# Altium PCB MotherBoard.PcbDoc
Units mil, origin at the board's own origin, x right, y up, seen from the top; angles counter-clockwise.
Board outline 4305 x 3670 mil, 2 copper layers (Top Layer, Bottom Layer); 19 components, 19 nets, 116 pads, 2 vias.
Unrouted connection lines stored in the file: 15.
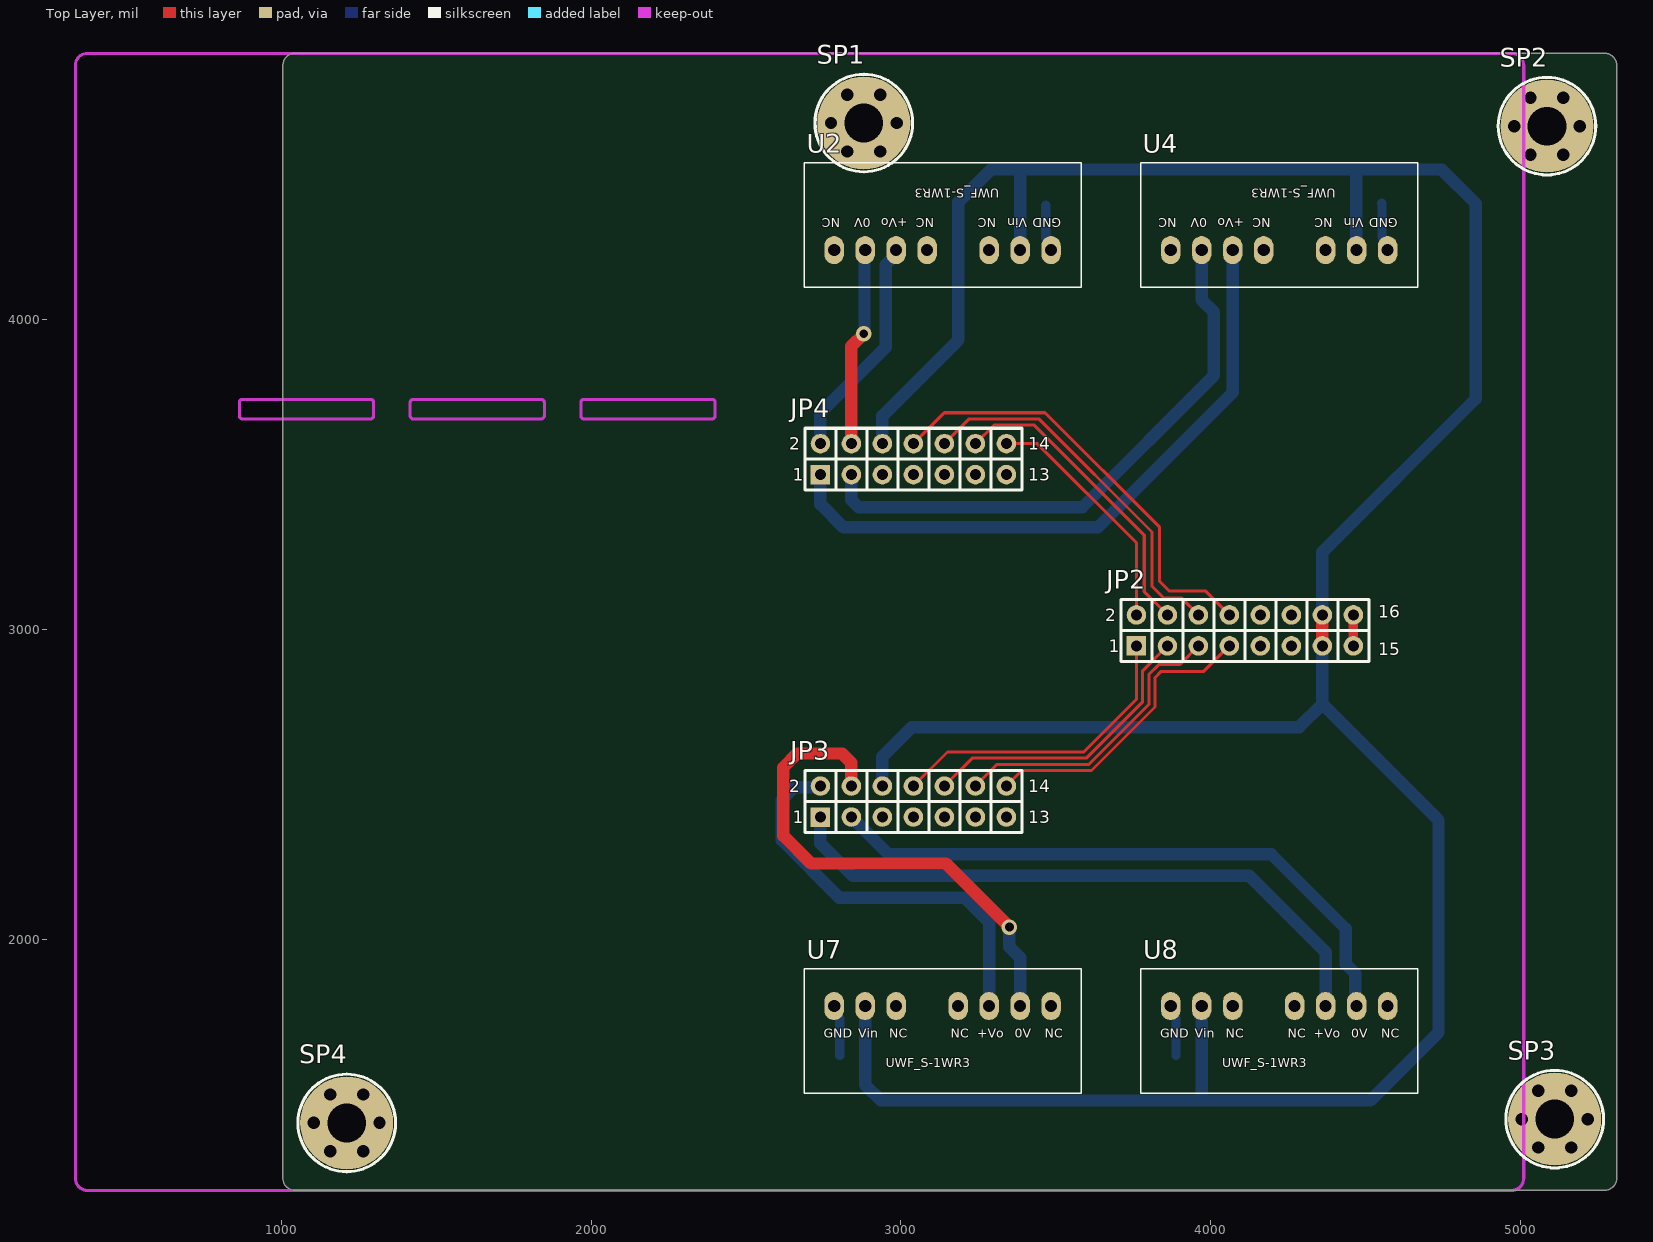
[diagram p0: Top Layer view]
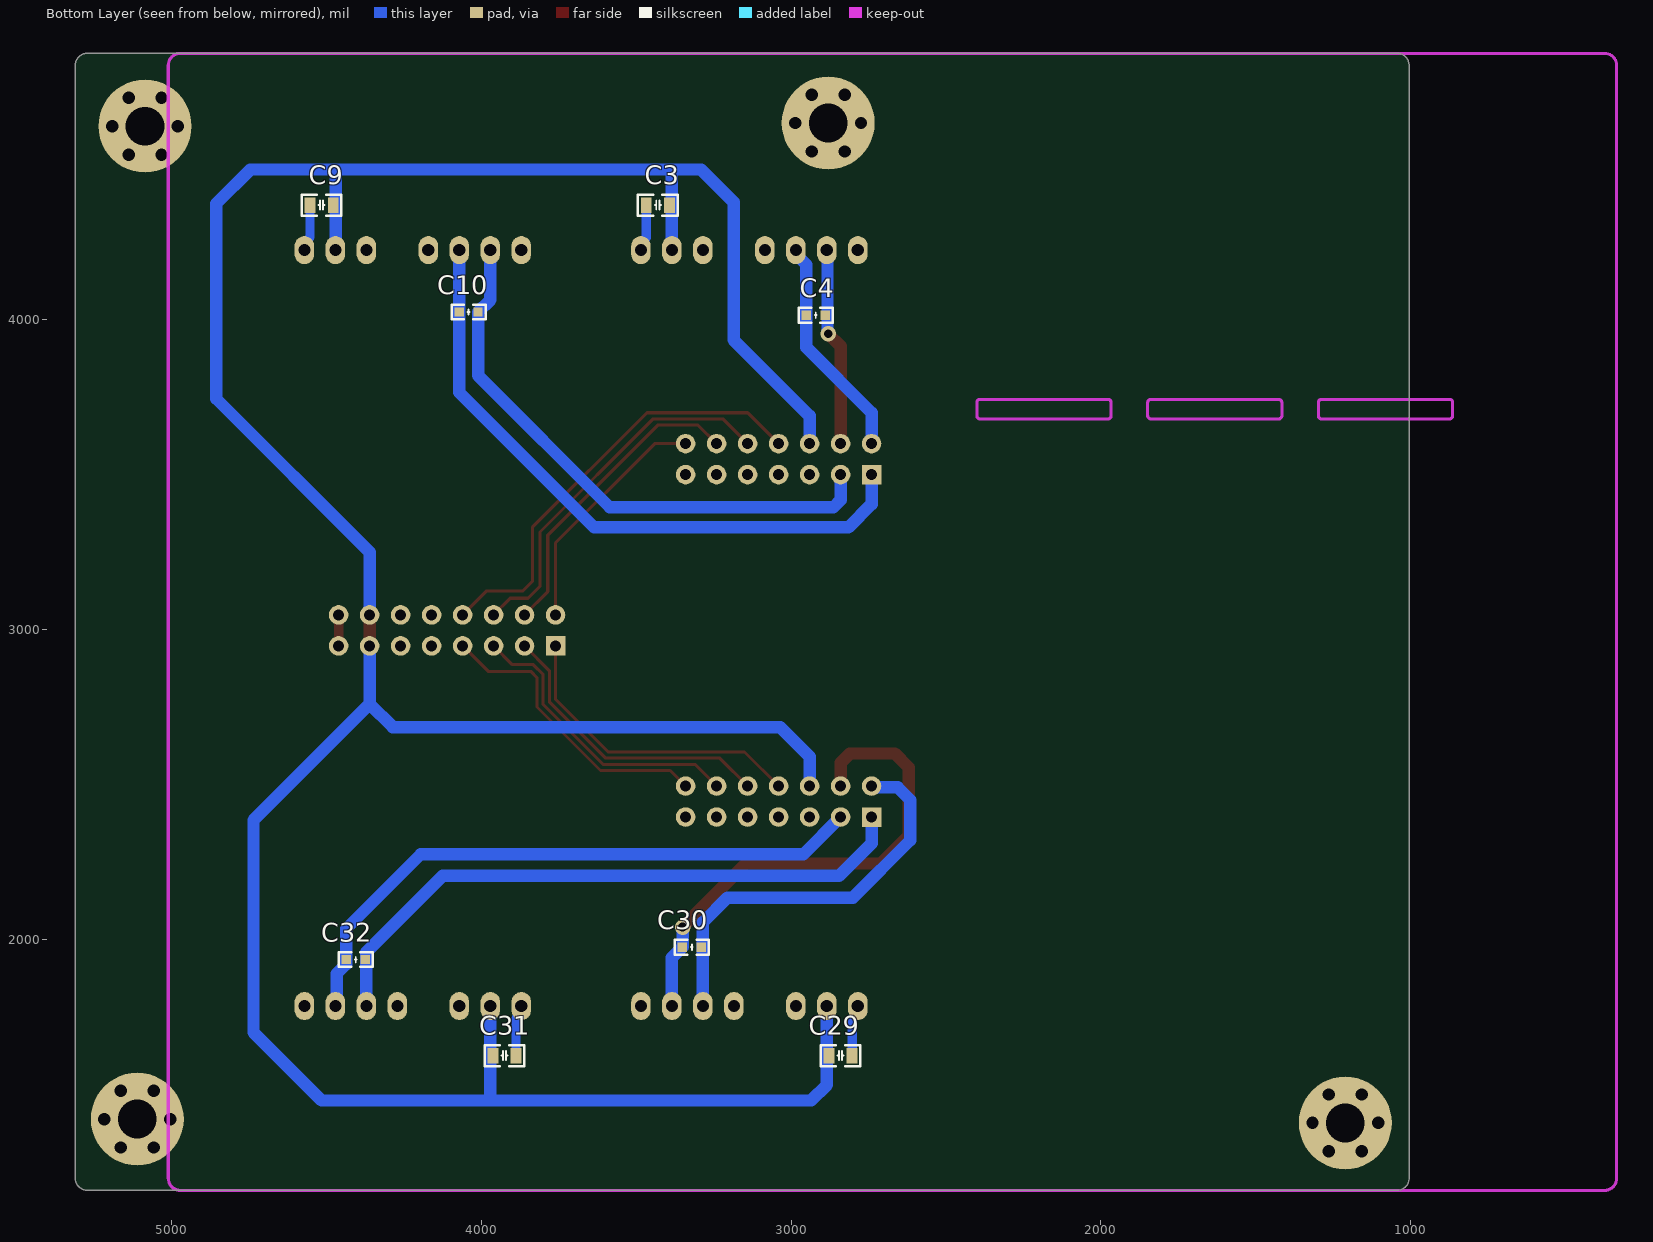
[diagram p1: Bottom Layer view, seen from below]

## Layer stack, top to bottom
Top Solder: solder mask 0.4, Solder Resist, Dk 3.5
Top Layer: signal copper 1.4
Dielectric 1: dielectric 12.6, FR-4, Dk 4.8
Bottom Layer: signal copper 1.4
Bottom Solder: solder mask 0.4, Solder Resist, Dk 3.5

## Board outline
1005,1229 1005,4821 cw(c1044,4821) 1044,4860 5271,4860 cw(c5271,4821) 5310,4821 5310,1229 cw(c5271,1229) 5271,1190 1044,1190 cw(c1044,1229)

## Design rules (kind name [scope] priority, off if disabled: settings)
Clearance [All] p1: gap=10 ignorepadtopadclearanceinfootprint=FALSE except(0: Arc-Hole Track-Hole SMDPad-Hole THPad-Hole Via-Hole Fill-Hole Poly-Hole Region-Hole Text-Hole)
PolygonConnect [All] p1: connectstyle=Direct reliefconductorwidth=10 reliefentries=4 polygonreliefangle="90 Angle" airgapwidth=10
RoutingVias [All] p1: holewidth=28 width=50 viastyle="Through Hole" minholewidth=28 minwidth=50 maxholewidth=28 maxwidth=50
SolderMaskExpansion [All] p1: expansion=4 istentingtop=FALSE
Width [All] p1: maxlimit=50 minlimit=5 preferedwidth=10 minimp=50.000000 maximp=50.000000 favimp=50.000000
30 further rules are at their usual default settings.

## Components (designator, comment, footprint, x,y, rotation, side; value= is the part's Value field where it differs from the comment)
C3 "100u" "C 0805_L" 3430,4370 r180 bottom
C4 "22u" "C 0603_L" 2920,4015 r0 bottom
C9 "100u" "C 0805_L" 4515,4370 r180 bottom
C10 "22u" "C 0603_L" 4040.59,4025 r0 bottom
C29 "100u" "C 0805_L" 2840,1625 r0 bottom
C30 "22u" "C 0603_L" 3320,1975 r180 bottom
C31 "100u" "C 0805_L" 3925,1625 r0 bottom
C32 "22u" "C 0603_L" 4405,1935 r180 bottom
JP2 "Header 8X2" HDR2.54-LI-2x8P 4110,2997.5 r0 top
JP3 "Header 2X7" HDR2.54-LI-2x7P 3040,2445 r0 top
JP4 "Header 2X7" HDR2.54-LI-2x7P 3040,3550 r0 top
SP1 "M3铜柱" M3x7+6_N 2880,4635 r0 top
SP2 "M3铜柱" M3x7+6_N 5085,4625 r0 top
SP3 "M3铜柱" M3x7+6_N 5110,1420 r0 top
SP4 "M3铜柱" M3x7+6_N 1210.94,1407.62 r0 top
U2 "UWF_S-1WR3" UWF_S-1WR3 3134.35,4225 r180 top
U4 "UWF_S-1WR3" UWF_S-1WR3 4220.59,4225 r180 top
U7 "UWF_S-1WR3" UWF_S-1WR3 3134.35,1785 r0 top
U8 "UWF_S-1WR3" UWF_S-1WR3 4220.59,1785 r0 top

## Footprints (in the part's own frame and the unit in brackets; to place one, negate y for a bottom-side part, rotate by r counter-clockwise, add the part's x,y. Pads: shape width x height; smd on the part's side, far side on the other; paste and mask are expansions set on the pad)
"C 0603_L" [mil] "无极性贴片电容"
  rect 30x30 smd: 1(-30.59,0) 2(30.59,0)
  silkscreen extent -55,-24 55,24, body extent -31,-16 31,16, height 32
"C 0805_L" [mil] "无极性贴片电容"
  rect 35x50 smd: 1(-37.4,0) 2(37.4,0)
  silkscreen extent -64,-34 64,34, body extent -39,-24 39,24, height 20
HDR2.54-LI-2x7P [mm] "双排排针，7x2脚"
  rect 1.6x1.6 hole 0.9: 1(-7.62,-1.27)
  round 1.6 hole 0.9: 2(-7.62,1.27) 3(-5.08,-1.27) 4(-5.08,1.27) 5(-2.54,-1.27) 6(-2.54,1.27) 7(0,-1.27) 8(0,1.27) 9(2.54,-1.27) 10(2.54,1.27) 11(5.08,-1.27) 12(5.08,1.27) 13(7.62,-1.27) 14(7.62,1.27)
  silkscreen extent -8.89,-2.54 8.89,2.54, body extent -8.89,-2.54 8.89,2.54, height 8.5
HDR2.54-LI-2x8P [mm] "双排排针，8x2脚"
  rect 1.6x1.6 hole 0.9: 1(-8.89,-1.27)
  round 1.6 hole 0.9: 2(-8.89,1.27) 3(-6.35,-1.27) 4(-6.35,1.27) 5(-3.81,-1.27) 6(-3.81,1.27) 7(-1.27,-1.27) 8(-1.27,1.27) 9(1.27,-1.27) 10(1.27,1.27) 11(3.81,-1.27) 12(3.81,1.27) 13(6.35,-1.27) 14(6.35,1.27) 15(8.89,-1.27) 16(8.89,1.27)
  silkscreen extent -10.16,-2.54 10.16,2.54, body extent -10.16,-2.54 10.16,2.54, height 8.5
M3x7+6_N [mil] "M3铜柱，长：7mm，螺纹长：6mm"
  round 40 hole 40: 1(-106,0) 1(-53,-91.8) 1(-53,91.8) 1(53,-91.8) 1(53,91.8) 1(106,0)
  round 300 hole 125: 1(0,0)
  silkscreen extent -157,-157 157,157, body extent -106,-93 106,93, height 278
UWF_S-1WR3 [mm]
  oval 1.6x2.3 hole 1: 1(-8.89,0) 2(-6.35,0) 3(-3.81,0) 5(1.27,0) 6(3.81,0) 7(6.35,0) 8(8.89,0)
  silkscreen extent -11.35,-7.15 11.35,3.05

## Part data
C3 C4 C9 C10 C29 C30 C31 C32: library part C, "无极性贴片电容", BOM名称=无极性贴片电容, 学习资源=www.ooocke.com, 材质=X7R, 版权归属=源创客
JP2: "8*2P接插件", BOM名称=8*2P接插件, 学习资源=www.ooocke.com, 版权归属=源创客
JP3 JP4: library part "Header 7X2", "7*2P接插件", BOM名称=7*2P接插件, 学习资源=www.ooocke.com, 版权归属=源创客
SP1 SP2 SP3 SP4: library part 铜柱加头大焊盘, "铜柱", BOM名称=铜柱, 学习资源=www.ooocke.com, 版权归属=源创客

## Via types
v1: diameter 50, hole 28, Top Layer to Bottom Layer, 2 vias

## Nets (pads, with @x,y where several pads share a name; then routed paths per layer and width w, separated by ;. In a path a pad name is that pad's centre, name@x,y a point inside that pad or via, vN(x,y) a via of type N, cw(c..) or ccw(c..) an arc to the next point about the centre after c; other vN are vias at no path point)
+9V_ISO_B1: C10.2 JP4.1 U4.6 | length 2097
  Bottom Layer w40: JP4.1 2740,3405 2815,3330 3635,3330 4071.18,3766.18 C10.2 4070.59,4025.59 U4.6
+9V_ISO_B2: C32.2 JP3.1 U8.6 | length 2034.9
  Bottom Layer w40: JP3.1 2740,2310 2845,2205 4124.41,2205 4370.59,1958.82 4370.59,1935 U8.6
+9V_ISO_T1: C4.2 JP4.2 U2.6 | length 726.2
  Bottom Layer w40: JP4.2 2740,3700 2950.59,3910.59 C4.2 2950.59,4177.46 2984.35,4211.22 U2.6
+9V_ISO_T2: C30.2 JP3.2 U7.6 | length 1323.4
  Bottom Layer w40: JP3.2 2735.6,2490.6 2655.6,2490.6 2615,2450 2615,2320 2800,2135 3205,2135 3285,2055 3285,1975 U7.6@3285,1785
AGND: C3.1 C9.1 C29.1 C31.1 JP2.15 JP2.16 JP3.5 JP3.7 JP3.9 JP3.11 JP3.13 JP4.5 JP4.7 JP4.9 JP4.11 JP4.13 U2.1 U4.1 U7.1 U8.1 | length 741.7
  Top Layer w30: JP2.15 JP2.16
  Bottom Layer w30: U7.1 2784.35,1762.29 2802.6,1744.05 C29.1 ; C3.1 3467.4,4264.65 3484.35,4247.71 U2.1 ; U8.1 3870.59,1762.29 3887.6,1745.29 C31.1 ; C9.1@4551.5,4375.9 C9.1@4552.4,4375 ; C9.1 4552.4,4265.89 4570.59,4247.71 U4.1 U4.1@4571.5,4224.09
Bot1_IN+: JP2.4 JP4.12 | length 1005.5
  Top Layer w10: JP4.12 3300,3660 3430,3660 3785,3305 3785,3122.5 JP2.4
Bot1_IN-: JP2.2 JP4.14 | length 785
  Top Layer w10: JP4.14 3440,3600 3760,3280 JP2.2
Bot2_IN+: JP2.5 JP3.12 | length 964.1
  Top Layer w10: JP3.12 3310,2565 3606.72,2565 3800,2758.28 3800,2855 3831.86,2886.86 3899.36,2886.86 JP2.5
Bot2_IN-: JP2.7 JP3.14 | length 963.1
  Top Layer w10: JP3.14 3390,2545 3615,2545 3820,2750 3820,2845 3840,2865 3977.5,2865 JP2.7
HVBUS: 
NetC33_2: 
PGND: C10.1 C32.1 JP3.3 JP4.3 U4.7 U8.7 | length 3867.5
  Bottom Layer w40: JP3.3 2960,2275 4195,2275 4435.59,2034.41 C32.1 4435.59,1920 4466.19,1889.4 4466.19,1789.4 U8.7 ; JP4.3 2840,3418.43 2863.43,3395 3585,3395 4010,3820 C10.1 3970.59,4064.41 U4.7
SW1: C4.1 JP4.4 U2.7 | length 643.4
  Top Layer w40: JP4.4 2840,3915 v1(2880,3955)
  Bottom Layer w40: v1(2880,3955) 2882.18,3957.18 2882.18,4222.82 U2.7
SW2: C30.1 JP3.4 U7.7 | length 1667.5
  Top Layer w40: JP3.4 2840,2570 2810,2600 2665,2600 2620,2555 2620,2335 2710,2245 3145,2245 v1(3350,2040)
  Bottom Layer w40: v1(3350,2040) 3350,1975.59 C30.1 3384.35,1941.24 U7.7
Top1_IN+: JP2.8 JP4.8 | length 1434.2
  Top Layer w10: JP4.8 3140,3700 3465,3700 3835,3330 3835,3155 3865,3125 3982.5,3125 JP2.8
Top1_IN-: JP2.6 JP4.10 | length 1217.6
  Top Layer w10: JP4.10 3220,3680 3445,3680 3810,3315 3810,3140 3848.75,3101.25 3906.25,3101.25 JP2.6
Top2_IN+: JP2.1 JP3.8 | length 1008.6
  Top Layer w10: JP3.8 3150,2605 3590.15,2605 3760,2774.85 JP2.1
Top2_IN-: JP2.3 JP3.10 | length 966.6
  Top Layer w10: JP3.10 3230,2585 3598.43,2585 3780,2766.57 3780,2867.5 JP2.3
VCC5V: C3.2 C9.2 C29.2 C31.2 JP2.13 JP2.14 JP3.6 JP4.6 U2.2 U4.2 U7.2 U8.2 | length 10304.2
  Top Layer w40: JP2.13 JP2.14
  Bottom Layer w40: U7.2 2884.35,1530.65 2935,1480 3970,1480 ; JP3.6 2940,2590 3035,2685 4285,2685 4360,2760 ; JP4.6 2940,3690 3185,3935 3185,4380 3290,4485 3385,4485 ; U2.2 3385,4225.65 3385,4485 ; U8.2 3970.59,1480.59 3970,1480 ; JP2.13 4360,2760 ; JP2.14 4360,3250 4855,3745 4855,4375 4745,4485 4470,4485 ; U4.2 4470,4225.59 4470,4485 ; 3385,4485 4470,4485 ; 3970,1480 4515,1480 4735,1700 4735,2385 4360,2760
pads on no net: JP2.9 JP2.10 JP2.11 JP2.12 SP1.1 SP2.1 SP3.1 SP4.1 U2.3 U2.5 U2.8 U4.3 U4.5 U4.8 U7.3 U7.5 U7.8 U8.3 U8.5 U8.8

## Polygon pours and split planes (outlines as drawn)
no net on Top Solder "NONET_L-01_P-001" (solid): 2055,4730 2145,4820 2365,4820 2425,4760 2425,4755 2425,4760 2430,4755 2430,4655 2055,4655
no net on Top Solder "NONET_L-01_P-001" (solid): 1190,4730 1280,4820 1500,4820 1560,4760 1560,4755 1560,4760 1565,4755 1565,4655 1190,4655

## Keep-outs
Keep-Out Layer:
  lines w10: 335,1229 ccw(c374,1229) 374,1190 4971,1190 ccw(c4971,1229) 5010,1229 5010,4821 ccw(c4971,4821) 4971,4860 374,4860 ccw(c374,4821) 335,4821 335,1229 ; 864.57,3690 ccw(c874.57,3690) 874.57,3680 1287.64,3680 ccw(c1287.64,3690) 1297.64,3690 1297.64,3732.99 ccw(c1287.64,3732.99) 1287.64,3742.99 874.57,3742.99 ccw(c874.57,3732.99) 864.57,3732.99 864.57,3690 ; 1415.75,3690 ccw(c1425.75,3690) 1425.75,3680 1838.82,3680 ccw(c1838.82,3690) 1848.82,3690 1848.82,3732.99 ccw(c1838.82,3732.99) 1838.82,3742.99 1425.75,3742.99 ccw(c1425.75,3732.99) 1415.75,3732.99 1415.75,3690 ; 1966.93,3690 ccw(c1976.93,3690) 1976.93,3680 2390,3680 ccw(c2390,3690) 2400,3690 2400,3732.99 ccw(c2390,3732.99) 2390,3742.99 1976.93,3742.99 ccw(c1976.93,3732.99) 1966.93,3732.99 1966.93,3690

## Text inside footprints (layer, text, board x,y; h text height)
JP2: Top Overlay "2" at 3660,3027.5 h40; Top Overlay "1" at 3670,2927.5 h40; Top Overlay "16" at 4540,3037.5 h40; Top Overlay "15" at 4540,2917.5 h40
JP3: Top Overlay "2" at 2640,2475 h40; Top Overlay "1" at 2650,2375 h40; Top Overlay "14" at 3410,2475 h40; Top Overlay "13" at 3410,2375 h40
JP4: Top Overlay "13" at 3410,3480 h40; Top Overlay "14" at 3410,3580 h40; Top Overlay "1" at 2650,3480 h40; Top Overlay "2" at 2640,3580 h40
U2: Top Overlay "+Vo" at 3022.23,4327.67 h30 r180; Top Overlay "NC" at 2804.56,4327.67 h30 r180; Top Overlay "0V" at 2901.63,4327.67 h30 r180; Top Overlay "GND" at 3517.35,4327.67 h30 r180; Top Overlay "Vin" at 3406.84,4327.67 h30 r180; Top Overlay "NC" at 3306.83,4327.67 h30 r180; Top Overlay "NC" at 3107.35,4327.67 h30 r180
U4: Top Overlay "+Vo" at 4108.47,4327.67 h30 r180; Top Overlay "NC" at 3890.8,4327.67 h30 r180; Top Overlay "0V" at 3987.87,4327.67 h30 r180; Top Overlay "GND" at 4603.59,4327.67 h30 r180; Top Overlay "Vin" at 4493.08,4327.67 h30 r180; Top Overlay "NC" at 4393.07,4327.67 h30 r180; Top Overlay "NC" at 4193.59,4327.67 h30 r180
U7: Top Overlay "+Vo" at 3246.47,1682.33 h30; Top Overlay "NC" at 3464.14,1682.33 h30; Top Overlay "0V" at 3367.07,1682.33 h30; Top Overlay "GND" at 2751.35,1682.33 h30; Top Overlay "Vin" at 2861.86,1682.33 h30; Top Overlay "NC" at 2961.87,1682.33 h30; Top Overlay "NC" at 3161.35,1682.33 h30
U8: Top Overlay "+Vo" at 4332.71,1682.33 h30; Top Overlay "NC" at 4550.38,1682.33 h30; Top Overlay "0V" at 4453.31,1682.33 h30; Top Overlay "GND" at 3837.59,1682.33 h30; Top Overlay "Vin" at 3948.1,1682.33 h30; Top Overlay "NC" at 4048.11,1682.33 h30; Top Overlay "NC" at 4247.59,1682.33 h30